# Allegro board CHOPPING_WAVE_OSC.brd
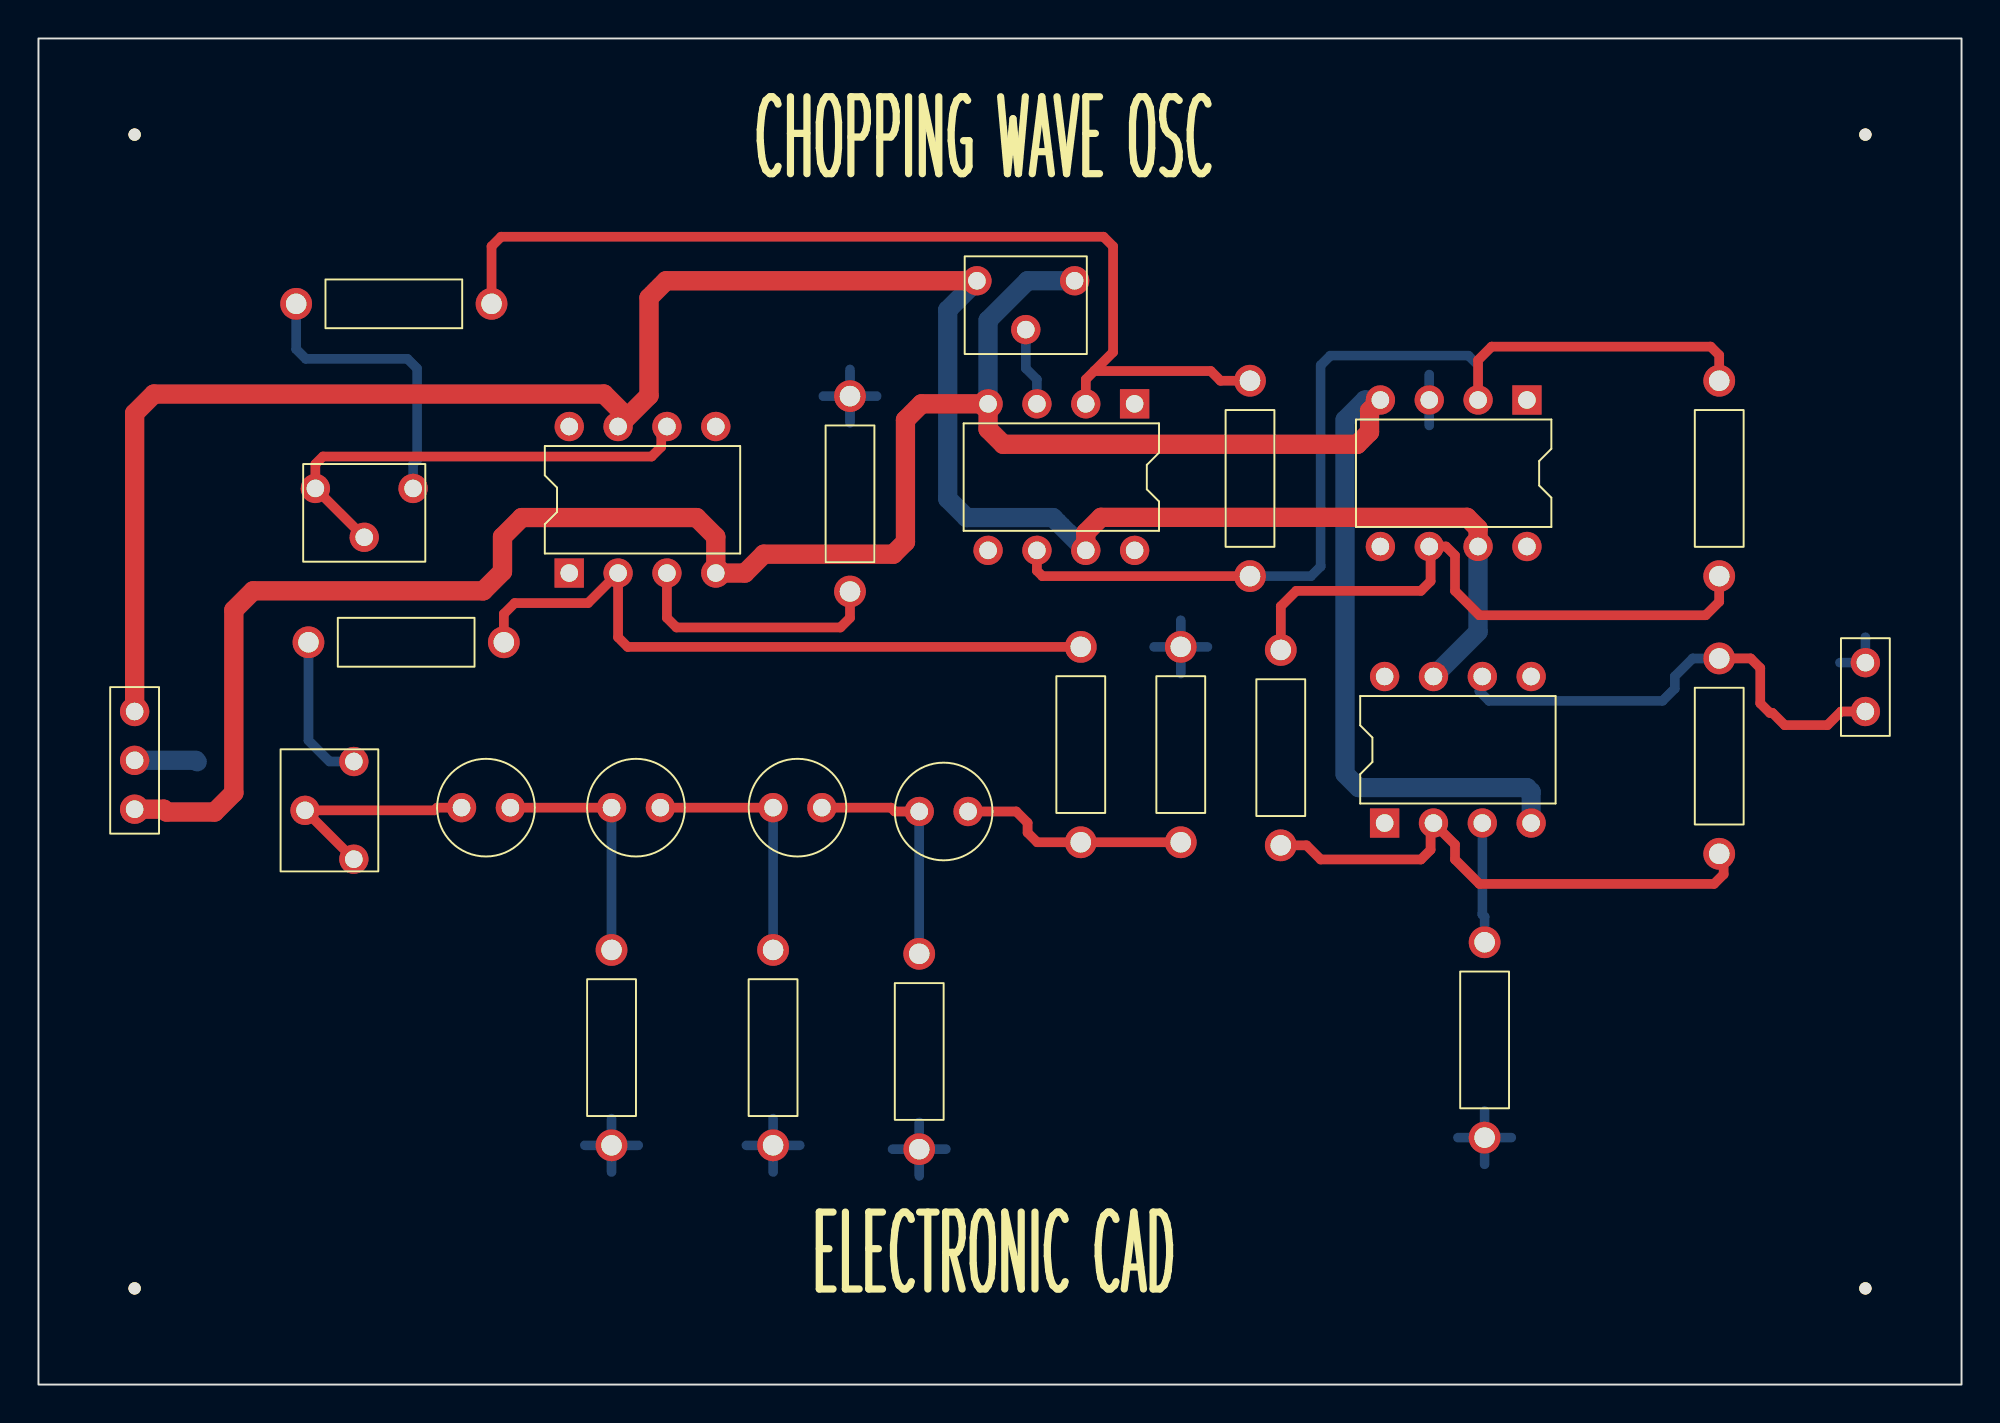
[diagram p0: board, top side]
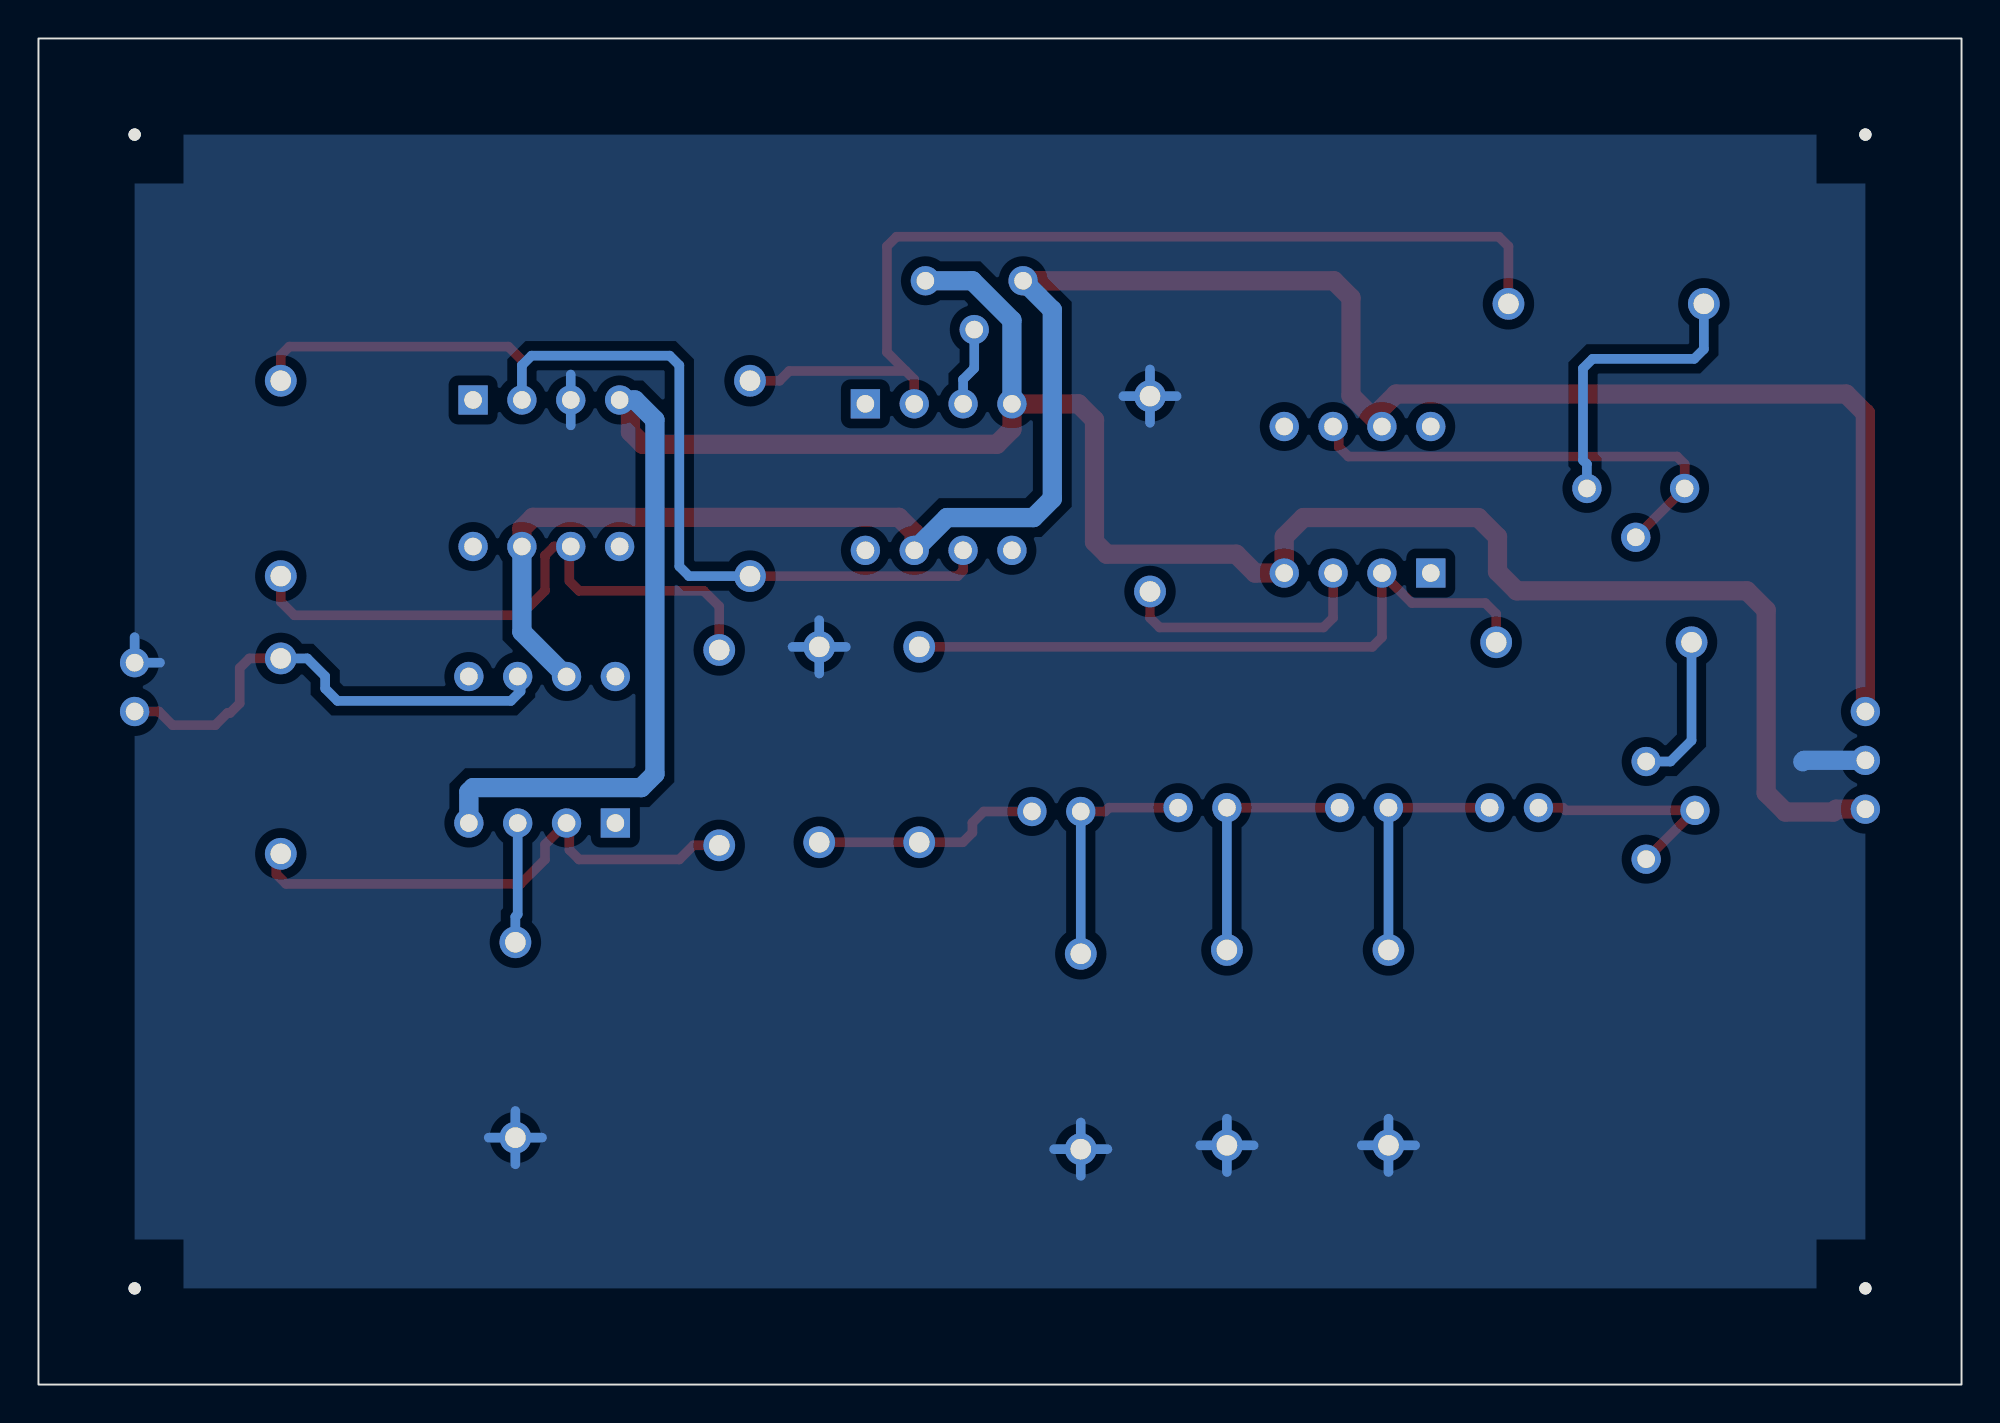
[diagram p1: board, bottom side, seen from below]

Outline 100 x 70 mm; copper layers: TOP, BOTTOM. Coordinates in mm from the lower left corner of the outline.
Outline path: rectangle 0,0 100,70

## Design rules (mm)
constraint set DEFAULT: min track width 0.5
nets with their own width: min track width 1; nets +12V -12V GND

## Placement (name value [footprint] x y rotation side)
C1  0.01uF  [CAP196]  22 30 270 top
C2  0.01uF  [CAP196]  29.8 30 270 top
C3  0.01uF  [CAP196]  38.2 30 270 top
C4  0.01uF  [CAP196]  45.8 29.8 270 top
J1  CON3  [JUMPER3]  5 35 270 top
J2  CON2  [JUMPER2]  95 35 90 top
NOREF  -  []  100 0 90 top
NOREF#2  -  [unnamed#2]  5 65 0 top
NOREF#3  -  [unnamed#2]  5 5 0 top
NOREF#4  -  [unnamed#2]  95 5 0 top
NOREF#5  -  [unnamed#2]  95 65 0 top
NOREF#6  -  []  0 70 0 top
R1  4.7k  [RES400]  29.8 22.6 180 top
R2  4.7k  [RES400]  38.2 22.6 180 top
R3  4.7k  [RES400]  45.8 22.4 180 top
R4  4.7k  [RES400]  59.4 28.2 0 top
R5  10k  [RES400]  54.2 28.2 0 top
R6  1k  [RES400]  42.2 51.4 180 top
R7  15k  [RES400]  24.2 38.6 90 top
R8  470k  [RESADJ]  16.4 32.4 0 top
R9  100k  [RESADJ]  14.4 46.6 90 top
R10  20k  [RES400]  13.4 56.2 270 top
R11  10k  [RES400]  63 52.2 180 top
R12  10k  [RESADJ]  48.8 57.4 90 top
R13  8.2k  [RES400]  87.4 52.2 180 top
R14  2.2k  [RES400]  64.6 38.2 180 top
R15  5.1k  [RES400]  75.2 23 180 top
R16  10k  [RES400]  87.4 27.6 0 top
U1  LF356  [DIP8_3]  27.6 42.2 90 top
U2  LF356  [DIP8_3]  57 51 270 top
U3  LF356  [DIP8_3]  77.4 51.2 270 top
U4  LF356  [DIP8_3]  70 29.2 90 top

## Library data of the parts
C1-C4 = CAP NP: Tolerance: ***; User Part Number: ***
J1 = CON3: User Part Number: ***
J2 = CON2_1: User Part Number: ***
R1-R7 R10 R11 R13-R16 = R: Tolerance: ***; User Part Number: ***
R8 R9 R12 = POT: Tolerance: ***; User Part Number: ***
U1-U4 = LF356: Tolerance: ***; User Part Number: ***

## Footprints (pads in the part's own frame, mm; a bottom-side part is the same pattern mirrored in y, then rotated)
CAP196
  round 1.524 hole 0.914: 1(0,0) 2(0,2.54)
DIP8_3
  rect 1.524x1.524 hole 0.914: 1(0,0)
  round 1.524 hole 0.914: 2(0,-2.54) 3(0,-5.08) 4(0,-7.62) 5(7.62,-7.62) 6(7.62,-5.08) 7(7.62,-2.54) 8(7.62,0)
JUMPER2
  round 1.524 hole 0.914: 1(0,0) 2(2.54,0)
JUMPER3
  round 1.524 hole 0.914: 1(0,0) 2(2.54,0) 3(5.08,0)
RES400
  round 1.651 hole 1.067: 1(0,0) 2(0,10.16)
RESADJ
  round 1.524 hole 0.914: 1(0,0) 2(-2.54,-2.54) 3(0,-5.08)
unnamed#2
  round 0.635 hole 3.175 unplated: (0,0)

## Nets
+12V: J1.1 R12.1 U1.7 U2.7 U3.7 U4.7
-12V: J1.3 R12.3 U1.4(V-) U2.4(V-) U3.4(V-) U4.4(V-)
GND: J1.2 J2.2 R1.2 R2.2 R3.2 R4.2 R6.1 R15.2 U3.3
OUTPUT: J2.1 R16.2 U4.6
SIG: R11.2 R13.1 U2.6 U3.2
N00379: C1.1 R8.2(WIPER) R8.3
N00400: R7.2 R8.1
N00408: R5.2 R7.1 U1.2
N00423: C4.2 R4.1 R5.1
N00430: C3.2 C4.1 R3.1
N00434: C2.2 C3.1 R2.1
N00438: C1.2 C2.1 R1.1
N00511: R6.2 U1.3
N00810: R9.1 R9.2(WIPER) U1.6
N00847: R9.3 R10.1
N00882: R10.2 R11.1 U2.2
N01083: R12.2(WIPER) U2.3
N01337: R13.2 R14.1 U3.6
N01656: R14.2 R16.1 U4.2
N01719: R15.1 U4.3

Pads without a net: U1 1 5 8; U2 1 5 8; U3 1 5 8; U4 1 5 8

## Routing (per net, layer and track width the routed paths; a pad name or vN(x,y) marks a point on that pad's centre or on a via; arc(x,y) is an arc through that point)
+12V: length 117.7
  TOP w1: U1.7 30.41,50.09 ; 30.41,50.09 31.75,51.43 31.75,56.52 32.63,57.4 R12.1 ; 30.41,50.09 30.41,50.51 29.41,51.51 6,51.51 5,50.51 J1.1 ; U3.7 74.86,44.52 74.28,45.1 55.26,45.1 54.46,44.3 U2.7
  BOTTOM w1: U3.7 74.86,39.14 U4.7 ; U2.7 52.76,45.09 48.26,45.09 47.28,46.06 47.28,55.88 R12.1
-12V: length 132.8
  TOP w1: J1.3 6.52,29.92 6.66,29.77 9.16,29.77 10.16,30.77 10.16,40.27 11.16,41.27 23.13,41.27 24.13,42.27 24.13,44.09 25.13,45.09 34.22,45.09 35.22,44.09 U1.4 36.74,42.2 37.72,43.18 44.45,43.18 45.09,43.81 45.09,50.16 45.92,51 U2.4 49.38,49.68 50.16,48.9 68.58,48.9 69.22,49.53 69.22,50.63 U3.4
  BOTTOM w1: U2.4 49.38,55.34 51.44,57.4 R12.3 ; U4.4 77.62,30.82 77.4,31.04 68.65,31.04 67.94,31.75 67.94,50.16 68.98,51.2 U3.4
GND: length 41.9
  BOTTOM w0.5: 42.2,50.01 R6.1 ; R6.1 43.59,51.4 ; R6.1 42.2,52.79 ; R6.1 40.81,51.4 ; R3.2 47.19,12.24 ; R3.2 45.8,13.63 ; R3.2 45.8,10.85 ; R3.2 44.41,12.24 ; 72.32,49.88 U3.3 72.32,52.52 ; R4.2 59.4,39.75 ; R4.2 59.4,36.97 ; R4.2 58.01,38.36 ; R4.2 60.79,38.36 ; R15.2 76.59,12.84 ; R15.2 75.2,14.23 ; R15.2 73.81,12.84 ; R15.2 75.2,11.45 ; R2.2 38.2,13.83 ; R2.2 39.59,12.44 ; R2.2 38.2,11.05 ; R2.2 36.81,12.44 ; 29.8,11.05 R1.2 ; R1.2 28.41,12.44 ; R1.2 31.19,12.44 ; R1.2 29.8,13.83 ; 93.68,37.54 J2.2 95,38.86
  BOTTOM w1: 8.26,32.38 8.18,32.46 J1.2
OUTPUT: length 25.2
  TOP w0.5: J2.1 93.73,35 93.02,34.29 90.81,34.29 90.17,34.92 90.03,34.92 89.53,35.42 89.53,37.26 89.03,37.76 R16.2
  BOTTOM w0.5: R16.2 86.02,37.76 85.09,36.83 85.09,36.19 84.45,35.55 75.43,35.55 74.93,36.05 74.93,36.67 U4.6
SIG: length 53.4
  TOP w0.5: R11.2 52.2,42.04 51.92,42.32 U2.6 ; R13.1 87.4,53.53 86.95,53.98 75.56,53.98 74.86,53.27 U3.2
  BOTTOM w0.5: U3.2 74.86,53 74.36,53.51 67.18,53.51 66.67,53 66.67,42.55 66.17,42.04 R11.2
N00379: length 11.8
  TOP w0.5: R8.3 R8.2 20.59,29.86 20.73,30 C1.1
N00400: length 7.9
  BOTTOM w0.5: R8.1 15.13,32.4 14.04,33.49 R7.2
N00408: length 35.9
  TOP w0.5: R7.1 24.2,40.08 24.77,40.64 28.58,40.64 U1.2 30.14,38.86 30.64,38.36 R5.2
N00423: length 12
  TOP w0.5: C4.2 50.84,29.8 51.44,29.21 51.44,28.7 51.94,28.2 R5.1 R4.1
N00430: length 12.5
  TOP w0.5: C3.2 44.33,30 44.53,29.8 C4.1
  BOTTOM w0.5: C4.1 R3.1
N00434: length 13.3
  TOP w0.5: C2.2 C3.1
  BOTTOM w0.5: C3.1 R2.1
N00438: length 12.7
  TOP w0.5: C1.2 C2.1
  BOTTOM w0.5: C2.1 R1.1
N00511: length 13.6
  TOP w0.5: U1.3 32.68,39.87 33.18,39.37 41.7,39.37 42.2,39.87 R6.2
N00810: length 24.4
  TOP w0.5: U1.6 32.38,49.52 32.38,48.76 31.89,48.26 14.79,48.26 14.4,47.87 R9.1 R9.2
N00847: length 15.4
  BOTTOM w0.5: R9.3 19.48,47.87 19.68,48.07 19.68,52.84 19.18,53.34 13.9,53.34 13.4,53.84 R10.1
N00882: length 52.8
  TOP w0.5: U2.2 54.46,52.27 54.9,52.7 ; 54.9,52.7 60.96,52.7 61.47,52.2 R11.1 ; 54.9,52.7 55.88,53.69 55.88,59.19 55.38,59.69 24.06,59.69 23.56,59.19 R10.2
N01083: length 4.1
  BOTTOM w0.5: R12.2 51.34,52.85 51.92,52.27 U2.3
N01337: length 31.7
  TOP w0.5: R14.1 64.6,40.47 65.41,41.27 71.89,41.27 72.39,41.77 72.39,43.51 U3.6 73.19,43.58 73.66,43.11 73.66,41.27 74.93,40.01 86.69,40.01 87.4,40.71 R13.2
N01656: length 28
  TOP w0.5: R14.2 65.94,28.04 66.67,27.3 71.89,27.3 72.39,27.8 72.39,29.05 U4.2 73.66,28.08 73.66,27.3 74.93,26.04 87.13,26.04 87.63,26.54 87.63,27.37 R16.1
N01719: length 6.2
  BOTTOM w0.5: U4.3 75.08,24.45 75.2,24.33 R15.1

## Copper pours and planes (outline as drawn; the poured copper is in the pictures)
GND on BOTTOM: 95,5 95,65 5,65 5,5 ; 2 cut-outs

## Text on the board
Ref Des/Silkscreen Top: CHOPPING WAVE OSC | ELECTRONIC CAD
DIMENSION: FIGURE | FINISHED_SIZE | 0.914 | 1.067 | 3.175 | DRILL CHART: TOP to BOTTOM | ALL UNITS ARE IN MILLIMETERS | PLATED | NON-PLATED | QTY | 54 | 26 | 4
